# EAGLE board projectexcitebike (EAGLE 5.06)
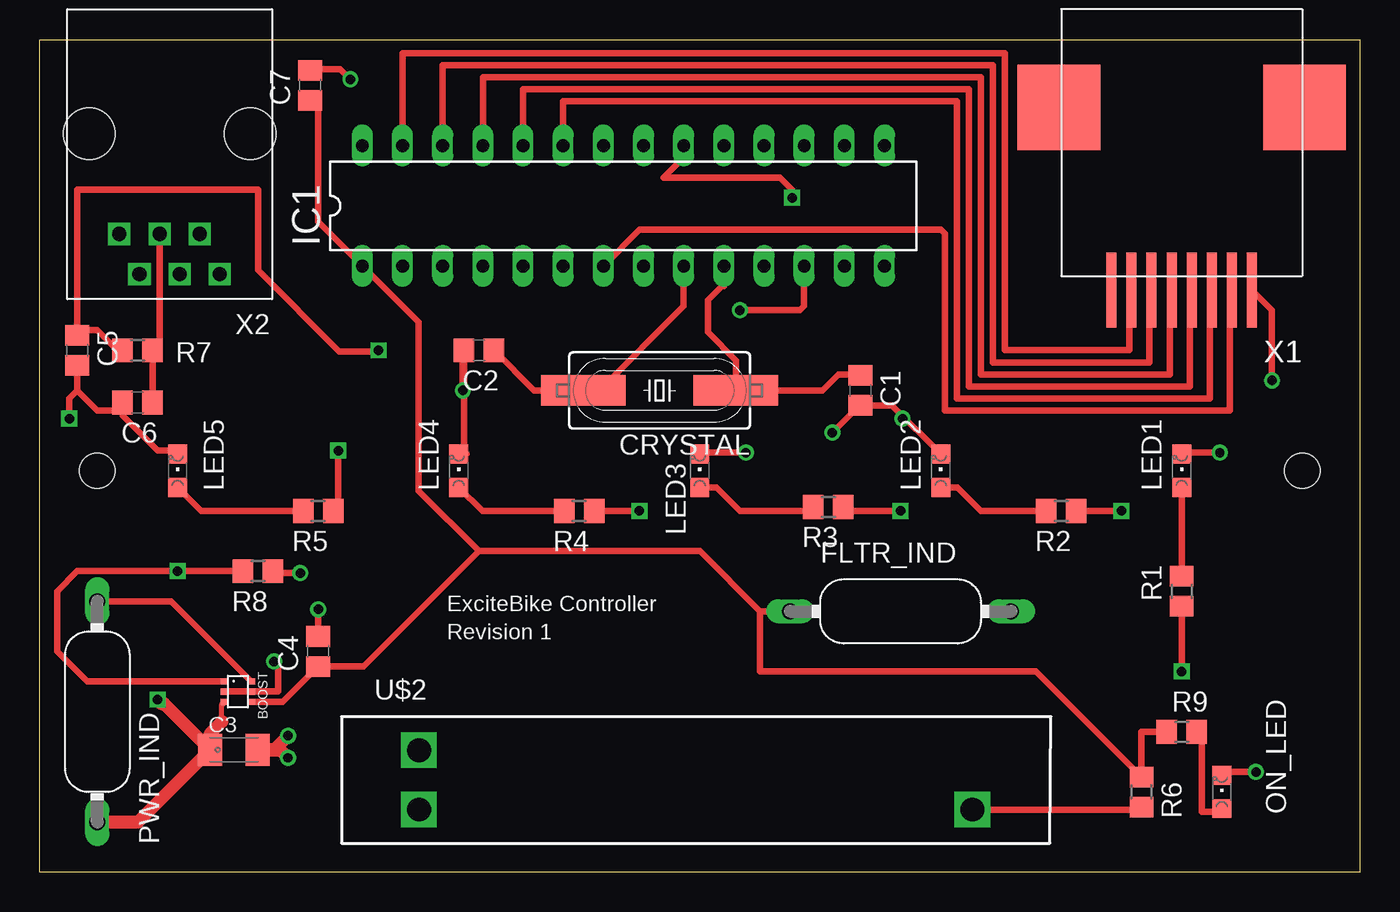
[diagram p0: board, top side]
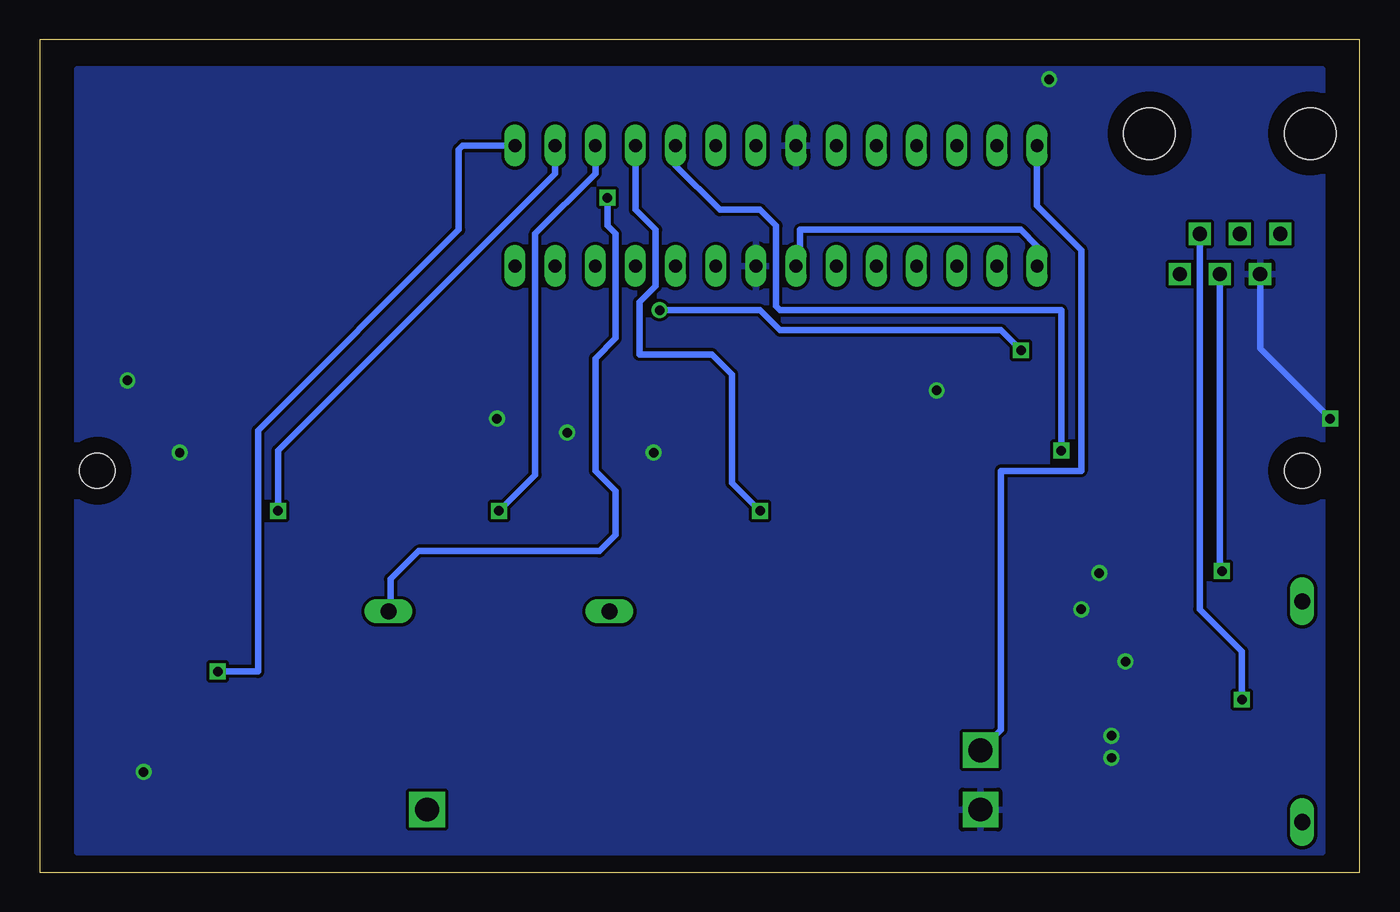
[diagram p1: board, bottom side, seen from below]

Size 83.52 x 52.68 mm. Coordinates in mm from the lower left corner, seen from the top.
Outline: 0,0 0,52.68 83.52,52.68 83.52,0 0,0
Copper layers (1*16): Top 0.035mm / dielectric 1.5mm / Bottom 0.035mm
Design rules "default *": minimum track width 10mil, minimum drill 24mil, track to track 8mil, track to pad 8mil, pad to pad 8mil, via to via 8mil, smd to smd 8mil, copper to edge 40mil, drill to drill 15mil, minimum pad ring 10mil, minimum via ring 8mil, stop-mask expansion 4mil, vias tented up to drill 0mil, thermal gap 10mil
Holes 2.24 mm at 3.66,25.4 79.86,25.4
tKeepout: area 77.6,23.1 to 82.1,27.7; area 1.4,23.1 to 5.9,27.7

## Footprints (pad centres in the part's own frame; a part is rotated, then mirrored left to right if it is on the bottom)
SC70 = smd 0.4 x 0.5: P$1 -0.65,-0.85; P$2 0,-0.85; P$3 0.65,-0.85; P$4 0.65,0.85; P$5 0,0.85; P$6 -0.65,0.85
C0805 = smd 1.3 x 1.5: 1 -0.95,0; 2 0.95,0
1206 = smd 1.5 x 2: 1 -1.5,0; 2 1.5,0
HC-49US = smd 5.334 x 1.93: 1 -4.826,0; 2 4.826,0
INDUCTOR_TH = drill 1.016 long: 1 -6.985,0; 2 6.985,0
DIL28-3 = drill 0.813 long: 1 -16.51,-3.81; 2 -13.97,-3.81; 3 -11.43,-3.81; 4 -8.89,-3.81; 5 -6.35,-3.81; 6 -3.81,-3.81; 7 -1.27,-3.81; 8 1.27,-3.81; 9 3.81,-3.81; 10 6.35,-3.81; 11 8.89,-3.81; 12 11.43,-3.81; 13 13.97,-3.81; 14 16.51,-3.81; 15 16.51,3.81; 16 13.97,3.81; 17 11.43,3.81; 18 8.89,3.81; 19 6.35,3.81; 20 3.81,3.81; 21 1.27,3.81; 22 -1.27,3.81; 23 -3.81,3.81; 24 -6.35,3.81; 25 -8.89,3.81; 26 -11.43,3.81; 27 -13.97,3.81; 28 -16.51,3.81
0805 = smd 1.2 x 1.2: A 0,-1.05; C 0,1.05
R0805 = smd 1.3 x 1.5: 1 -0.95,0; 2 0.95,0
SLIDER = drill 1.5 square: P$1 -17.5,-1.875; P$2 -17.5,1.875; P$3 17.5,-1.875
RJ45-SMT = smd 0.635 x 4.75: P$A 3.175,17.78; P$B 4.445,17.78; P$C 5.715,17.78; P$D 6.985,17.78; P$E 8.255,17.78; P$F 9.525,17.78; P$G 10.795,17.78; P$H 12.065,17.78 | smd 5.24 x 5.4: SH1 -0.15,6.24; SH2 15.39,6.24
RJ11-SMT = drill 0.89 square: P$1 1.91,8.89; P$2 3.18,6.35; P$3 4.45,8.89; P$4 5.72,6.35; P$5 6.99,8.89; P$6 8.26,6.35 | hole 3.25: 0,0; 10.16,0

## Placement (x,y rotation side)
BOOST  LTC3525-3.3  [SC70]  12.55,11.43 270 top
C1  22pf  [C0805]  51.92,30.48 270 top
C2  22pf  [C0805]  27.79,33.02 180 top
C3  10uF  [1206]  12.29,7.75 0 top
C4  10uf  [C0805]  17.63,13.97 90 top
C5  10uF  [C0805]  2.39,33.02 270 top
C6  10uF  [C0805]  6.2,29.72 180 top
C7  10nF  [C0805]  17.12,49.78 90 top
CRYSTAL  16MHz  [HC-49US]  39.22,30.48 180 top
FLTR_IND  10uH  [INDUCTOR_TH]  54.46,16.51 0 top
IC1  ATMEGA168-PU  [DIL28-3]  36.93,42.16 0 top
LED1  598-8110-107F  [0805]  72.24,25.4 0 top
LED2  598-8110-107F  [0805]  57,25.4 0 top
LED3  598-8110-107F  [0805]  41.76,25.4 0 top
LED4  598-8110-107F  [0805]  26.52,25.4 0 top
LED5  598-8110-107F  [0805]  8.74,25.4 0 top
ON_LED  598-8110-107F  [0805]  74.78,5.08 0 top
PWR_IND  10uH  [INDUCTOR_TH]  3.66,10.16 90 top
R1  [R0805]  72.24,17.78 90 top
R2  [R0805]  64.62,22.86 180 top
R3  [R0805]  49.89,23.11 180 top
R4  [R0805]  34.14,22.86 180 top
R5  [R0805]  17.63,22.86 180 top
R6  1K  [R0805]  69.7,5.08 270 top
R7  100K  [R0805]  6.2,33.02 180 top
R8  10M  [R0805]  13.82,19.05 180 top
R9  1K  [R0805]  72.24,8.89 0 top
U$2  10K_SLIDER  [SLIDER]  41.5,5.84 0 top
X1  AMPHENOL_RJ45  [RJ45-SMT]  79.86,54.61 180 top
X2  AMPHENOL_RJ11  [RJ11-SMT]  13.31,46.74 180 top

## Library data of the parts
BOOST C3 CRYSTAL FLTR_IND LED1-LED5 ON_LED PWR_IND U$2 X1 X2 = excitebike
C1 C2 C4-C7 R1-R9 = rcl
IC1 = Arduino-AVR

## Nets
C6: C6.1 R7.1 X2.P$4
FC2: C5.1 IC1.12 R7.2
GND: BOOST.P$2 BOOST.P$5 C1.2 C2.2 C3.2 C4.2 C5.2 C6.2 C7.2 IC1.8 IC1.22 LED1.C LED2.C LED3.C LED4.C LED5.C ON_LED.C R8.1 U$2.P$1 X1.P$A X2.P$5
N$2: BOOST.P$6 PWR_IND.2
N$3: BOOST.P$1 R8.2 X2.P$3
N$5: LED1.A R1.2
N$6: LED2.A R2.2
N$7: LED3.A R3.2
N$8: LED4.A R4.2
N$9: LED5.A R5.2
N$10: BOOST.P$3 C3.1 PWR_IND.1 X2.P$2
N$11: R6.2 U$2.P$3
N$12: IC1.15 R1.1
N$13: FLTR_IND.2 IC1.20
N$14: IC1.16 R2.1
N$15: IC1.17 R3.1
N$16: IC1.18 R4.1
N$17: IC1.19 R5.1
N$18: C2.1 CRYSTAL.2 IC1.9
N$19: IC1.23 X1.P$C
N$20: IC1.24 X1.P$D
N$21: IC1.25 X1.P$E
N$22: IC1.26 X1.P$F
N$23: C1.1 CRYSTAL.1 IC1.10
N$24: ON_LED.A R9.2
SPEED_POT: IC1.28 U$2.P$2
TO_RING: IC1.27 X1.P$G
VCC: BOOST.P$4 C4.1 C7.1 FLTR_IND.1 IC1.1 IC1.7 R6.1 R9.1 X1.P$B

## Tracks (layer width: path | path; a pad name or v marks a point on that pad's centre or on a via)
C6
  Top 0.406: C6.1 R7.1 7.59,33.46 X2.P$4
FC2  (via drill 0.6)
  Top 0.406: IC1.12 48.36,35.81 48.11,35.56 v44.3,35.56 | v21.44,33.02 21.37,32.95 18.96,32.95 13.82,38.1 13.82,43.18 2.39,43.18 C5.1 2.71,34.29 3.66,34.29 4.93,33.02 R7.2
  Bottom 0.406: v44.3,35.56 37.95,35.56 36.68,34.29 22.71,34.29 v21.44,33.02
GND  (via drill 0.6)
  Top 0.406: 53.92,29.53 C1.2 | 53.92,29.53 LED2.C | C2.2 26.84,33.34 | 26.84,26.45 LED4.C 27.03,26.45 26.84,26.64 C2.2 | C7.2 17.19,50.8 19.02,50.8 v19.66,50.16 | BOOST.P$2 BOOST.P$5 15.09,11.43 15.09,13.08 v14.83,13.33 | 2.39,30.48 C5.2 | 2.39,30.48 3.66,29.21 4.74,29.21 C6.2 5.25,28.89 7.47,26.67 8.52,26.67 LED5.C | v1.88,28.7 1.88,29.97 2.39,30.48 | v26.77,30.48 26.77,32.95 C2.2 | 53.92,29.53 51.86,29.53 v50.14,27.81 | v44.68,26.54 41.85,26.54 LED3.C | v76.94,6.35 75,6.35 ON_LED.C | v77.95,31.11 77.95,35.56 X1.P$A | v74.65,26.54 72.33,26.54 LED1.C | v17.63,16.64 C4.2 | v16.48,18.92 14.89,18.92 R8.1
  Top 0.813: 14.07,7.75 14.83,7.75 v15.72,8.64 | 14.07,7.75 C3.2 | 14.07,7.75 15.21,7.75 v15.72,7.24
  Bottom 0.406: X2.P$5 6.32,33.14 v1.88,28.7
  other vias: 54.58,28.7
  pour Bottom: 2.39,50.8 81.13,50.8 81.13,1.27 2.39,1.27
N$2
  Top 0.406: PWR_IND.2 8.33,17.14 BOOST.P$6
N$3  (via drill 0.6)
  Top 0.406: R8.2 v8.74,19.05 2.39,19.05 1.12,17.78 1.12,13.97 3.01,12.08 BOOST.P$1
  Bottom 0.406: X2.P$3 8.86,19.17 v8.74,19.05
N$5
  Top 0.406: R1.2 LED1.A
N$6
  Top 0.406: LED2.A 58.05,24.35 59.54,22.86 R2.2
N$7
  Top 0.406: LED3.A 42.81,24.35 44.3,22.86 49.19,22.86 | 49.19,22.86 49.38,22.86 | 49.19,22.86 R3.2
N$8
  Top 0.406: R4.2 28.01,22.86 LED4.A
N$9
  Top 0.406: R5.2 10.23,22.86 LED5.A
N$10  (via drill 0.6)
  Top 0.305: 11.53,9.52 11.53,10.61 BOOST.P$3
  Top 0.406: v7.47,10.92 7.72,10.67 | BOOST.P$3 11.59,10.67
  Top 0.813: PWR_IND.1 6.22,3.17 C3.1 | 7.72,10.67 7.87,10.67 C3.1 | C3.1 10.79,8.79 11.53,9.52
  Bottom 0.406: X2.P$2 10.13,16.63 7.47,13.97 v7.47,10.92
N$11
  Top 0.406: U$2.P$3 69.53,3.97 R6.2
N$12  (via drill 0.6)
  Top 0.406: v72.24,12.7 R1.1
  Bottom 0.406: IC1.15 56.74,45.97 57,45.72 57,40.64 69.7,27.94 69.7,12.7 v72.24,12.7
N$13  (via drill 0.6)
  Top 0.406: IC1.20 40.74,45.21 39.47,43.94 46.84,43.94 47.6,43.18 v47.6,42.67
  Bottom 0.406: v47.6,42.67 47.6,40.89 47.09,40.39 47.09,33.78 48.36,32.51 48.36,25.4 47.09,24.13 47.09,21.34 48.11,20.32 59.54,20.32 61.32,18.54 61.32,16.64 FLTR_IND.2
N$14  (via drill 0.6)
  Top 0.406: R2.1 v68.43,22.86
  Bottom 0.406: IC1.16 50.9,44.2 68.43,26.67 v68.43,22.86
N$15  (via drill 0.6)
  Top 0.406: v54.46,22.86 51.09,22.86 R3.1
  Bottom 0.406: IC1.17 48.36,44.2 52.17,40.39 52.17,25.15 v54.46,22.86
N$16  (via drill 0.6)
  Top 0.406: v37.95,22.86 R4.1
  Bottom 0.406: IC1.18 45.82,41.91 44.55,40.64 44.55,37.08 45.57,36.07 45.57,32.77 41,32.77 39.73,31.5 39.73,24.64 v37.95,22.86
N$17  (via drill 0.6)
  Top 0.406: v18.9,26.67 18.9,22.86 R5.1
  Bottom 0.406: IC1.19 43.28,44.7 40.49,41.91 37.95,41.91 36.93,40.89 36.93,35.81 36.68,35.56 18.9,35.56 v18.9,26.67
N$18
  Top 0.406: IC1.9 40.74,35.81 35.41,30.48 CRYSTAL.2 31.28,30.48 C2.1
N$19
  Top 0.406: IC1.23 33.12,48.77 58.01,48.77 58.01,29.97 74.02,29.97 74.02,36.83 X1.P$C
N$20
  Top 0.406: IC1.24 30.58,49.53 58.78,49.53 58.78,30.73 72.75,30.73 72.75,36.83 X1.P$D
N$21
  Top 0.406: IC1.25 28.04,50.29 59.54,50.29 59.54,31.5 71.48,31.5 71.48,36.83 X1.P$E
N$22
  Top 0.406: IC1.26 25.5,51.05 60.3,51.05 60.3,32.26 70.21,32.26 70.21,36.83 X1.P$F
N$23
  Top 0.406: CRYSTAL.1 43.28,31.24 | 43.28,37.21 43.28,37.08 | 43.28,37.21 IC1.10 | CRYSTAL.1 49.5,30.48 50.52,31.5 51.85,31.5 C1.1 | CRYSTAL.1 44.04,32.38 42.27,34.16 42.27,36.2 43.28,37.21
N$24
  Top 0.406: R9.2 73.51,8.89 73.51,3.81 74.78,3.81 ON_LED.A
SPEED_POT
  Bottom 0.406: IC1.28 20.42,42.16 17.63,39.37 17.63,25.4 22.71,25.4 22.71,9.01 U$2.P$2
TO_RING
  Top 0.406: IC1.27 22.96,51.82 61.06,51.82 61.06,33.02 68.94,33.02 68.94,36.83 X1.P$G
VCC
  Top 0.406: IC1.1 20.17,38.1 | 45.57,16.51 41.76,20.32 27.79,20.32 | 27.79,20.32 23.98,24.13 23.98,34.8 IC1.1 | 45.57,16.51 FLTR_IND.1 | 45.57,16.51 45.57,12.7 63.03,12.7 R6.1 69.7,8.89 R9.1 | X1.P$B 75.29,36.83 75.29,29.21 57.25,29.21 57.25,40.39 57,40.64 37.95,40.64 IC1.7 | BOOST.P$4 15.39,10.78 C4.1 20.49,13.02 27.79,20.32 | C7.1 17.63,48.33 17.63,41.15 IC1.1
  Bottom 0.406: IC1.1 20.42,39.62 21.44,40.64 35.41,40.64 35.41,38.61 IC1.7 35.41,38.1

## Text on the board
tPlace: ExciteBike Controller | Revision 1